# Altium PCB Sensor.PcbDoc
Units mm, origin at the board's own origin, x right, y up, seen from the top; angles counter-clockwise.
Board outline 47.6 x 56 mm, 2 copper layers (Top Layer, Bottom Layer), stack 1.591 mm thick; 35 components, 27 nets, 158 pads, 506 vias.
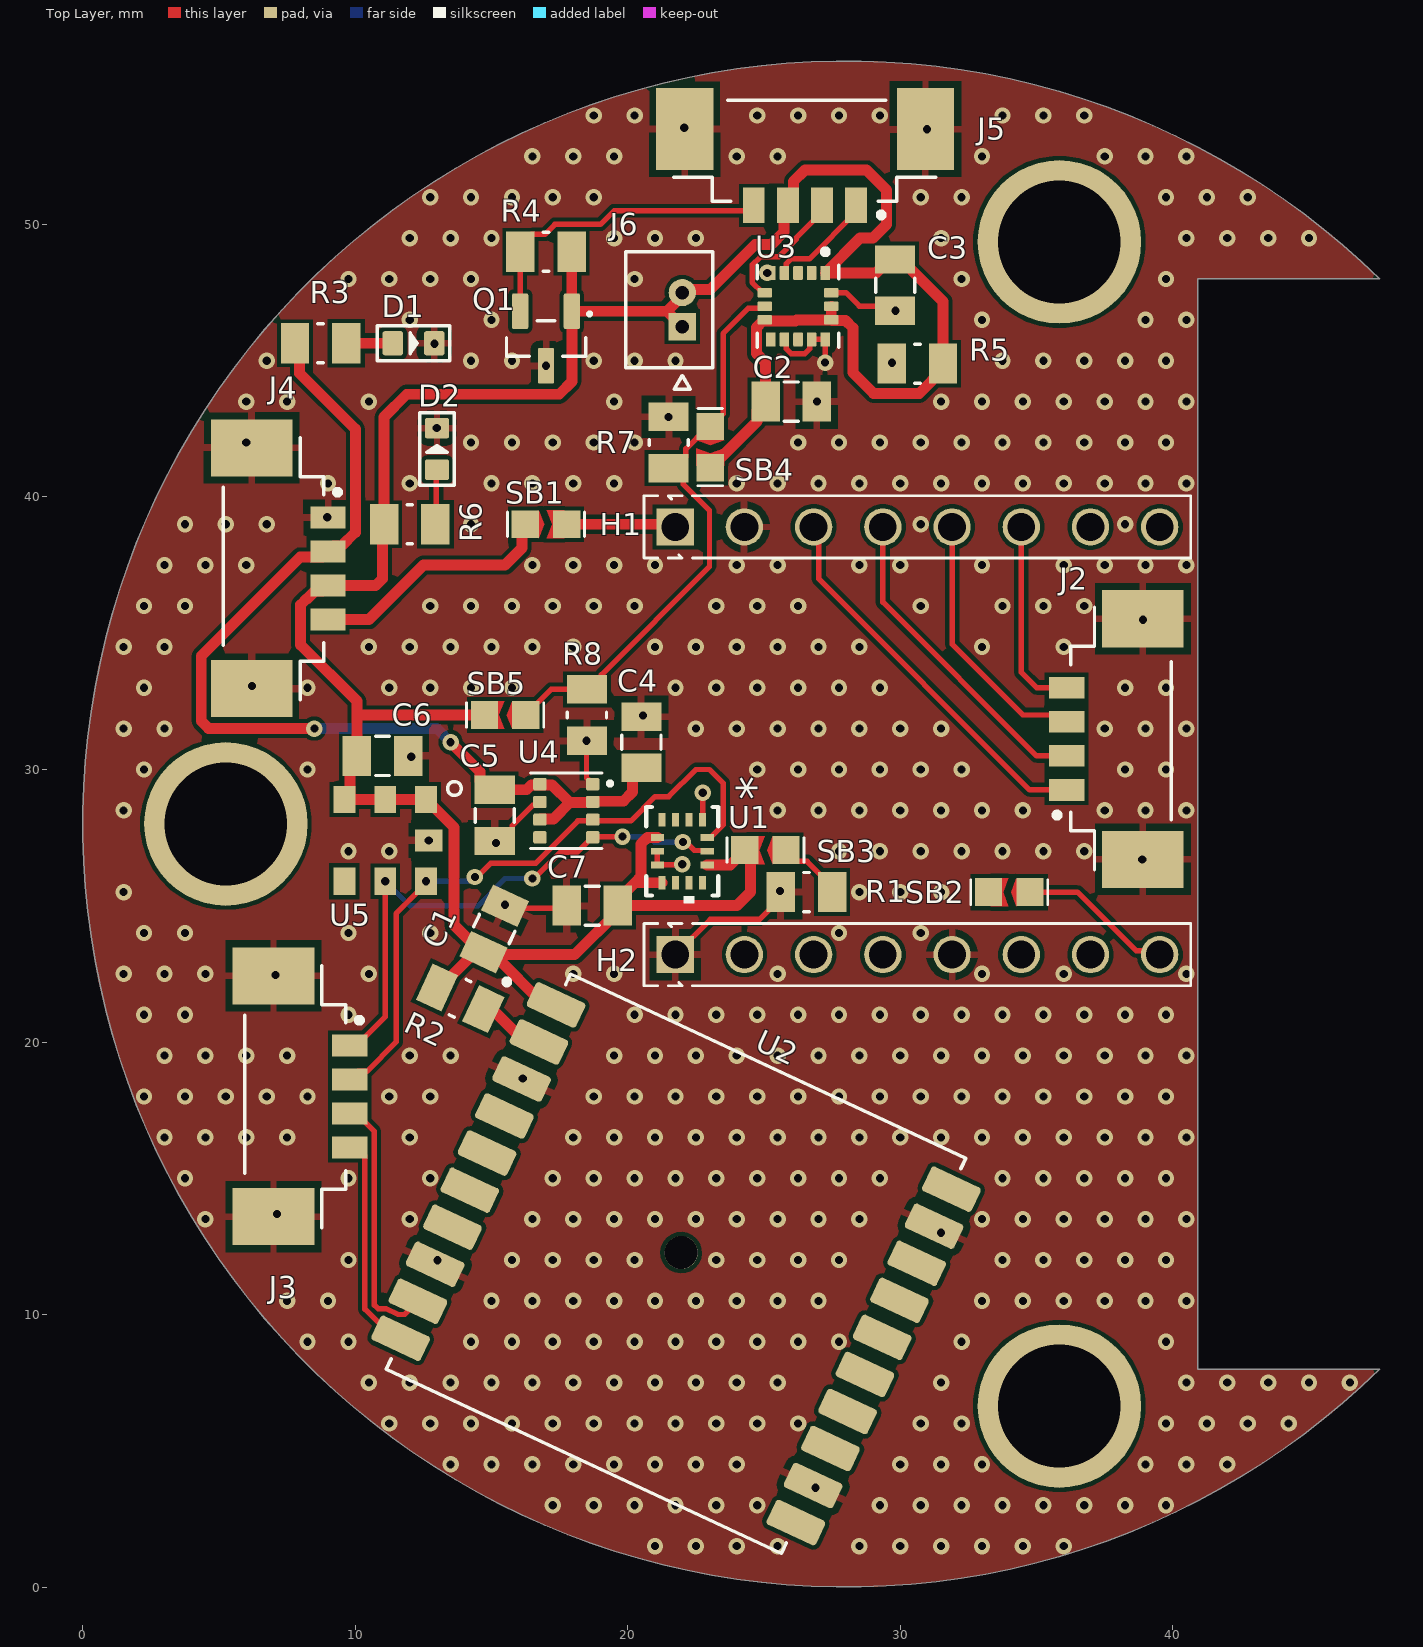
[diagram p0: Top Layer view]
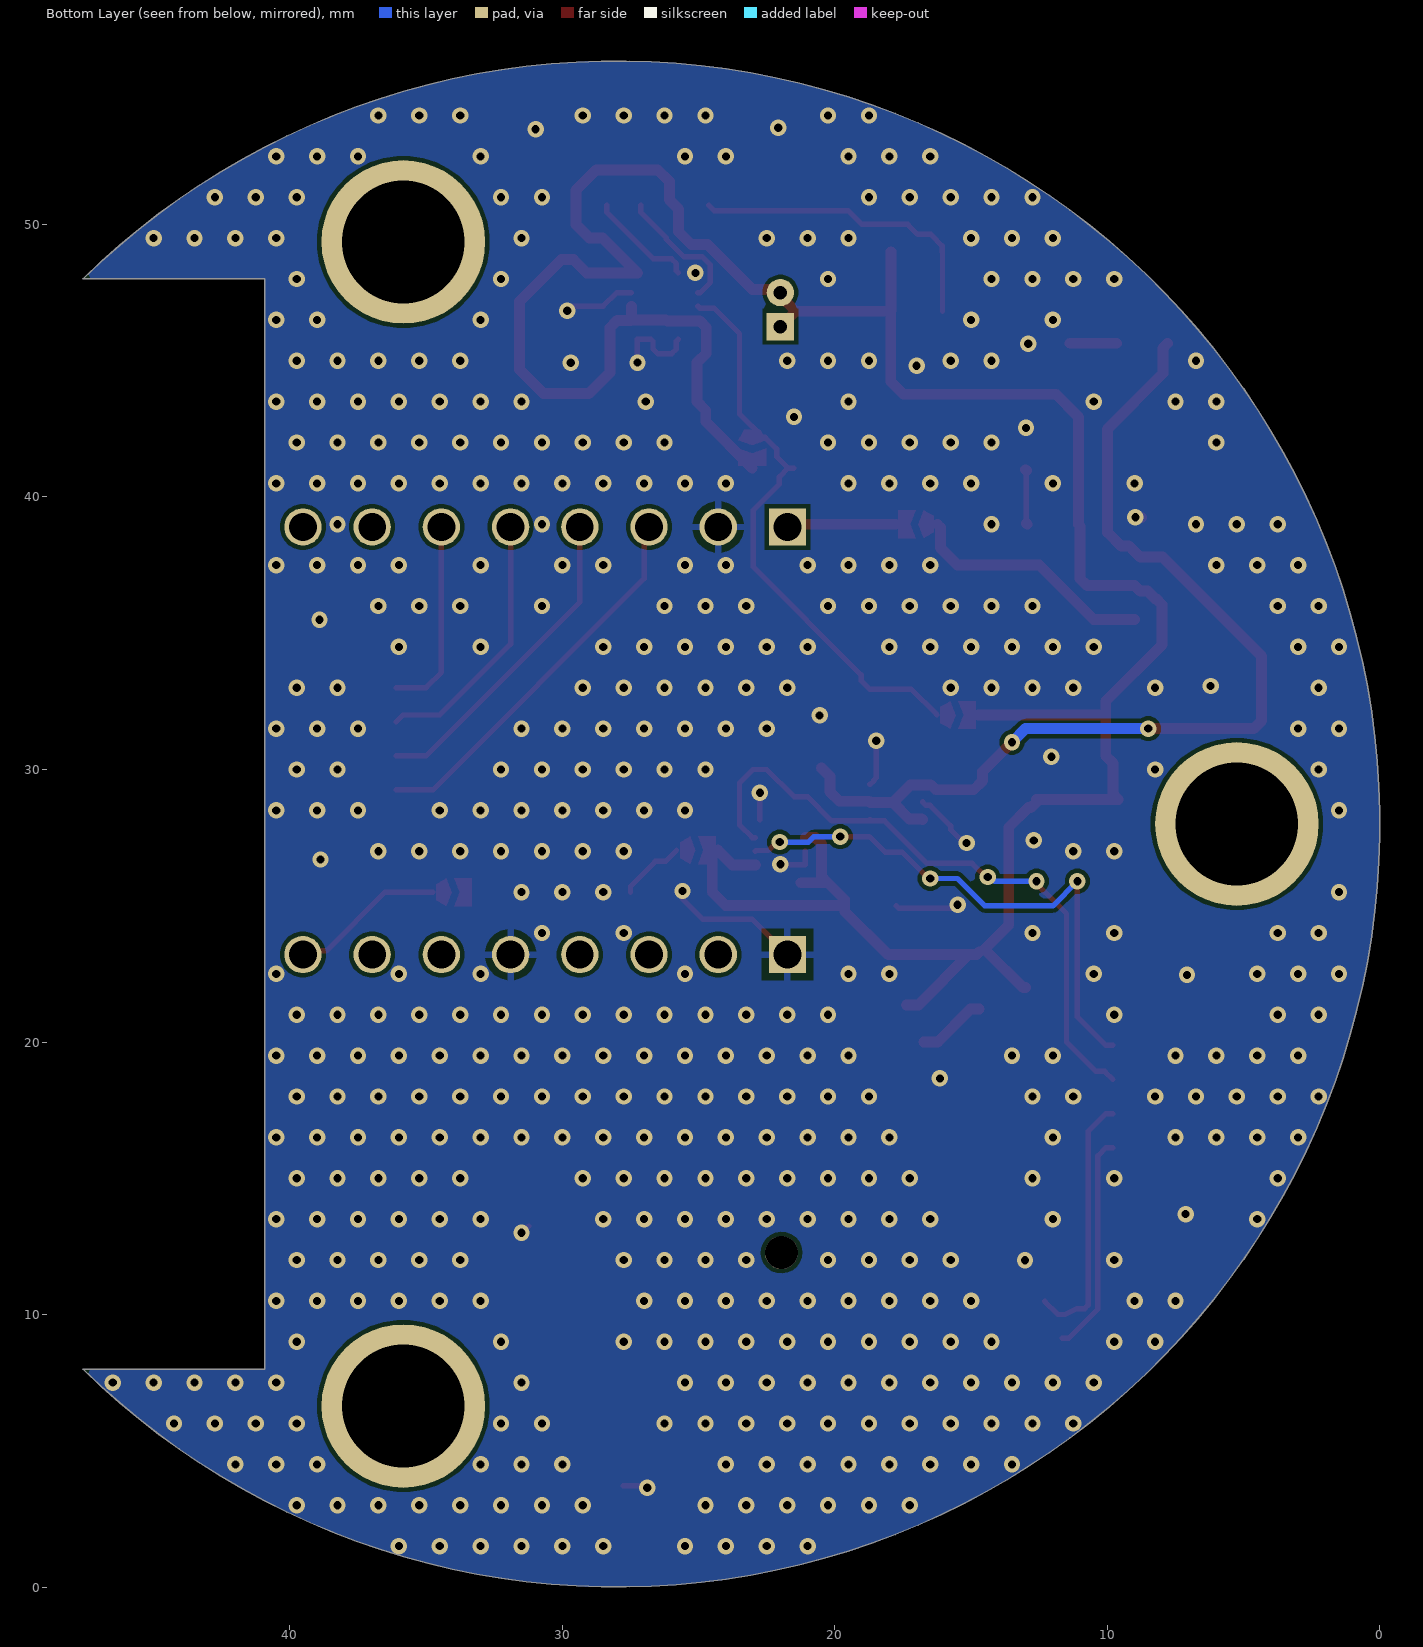
[diagram p1: Bottom Layer view, seen from below]
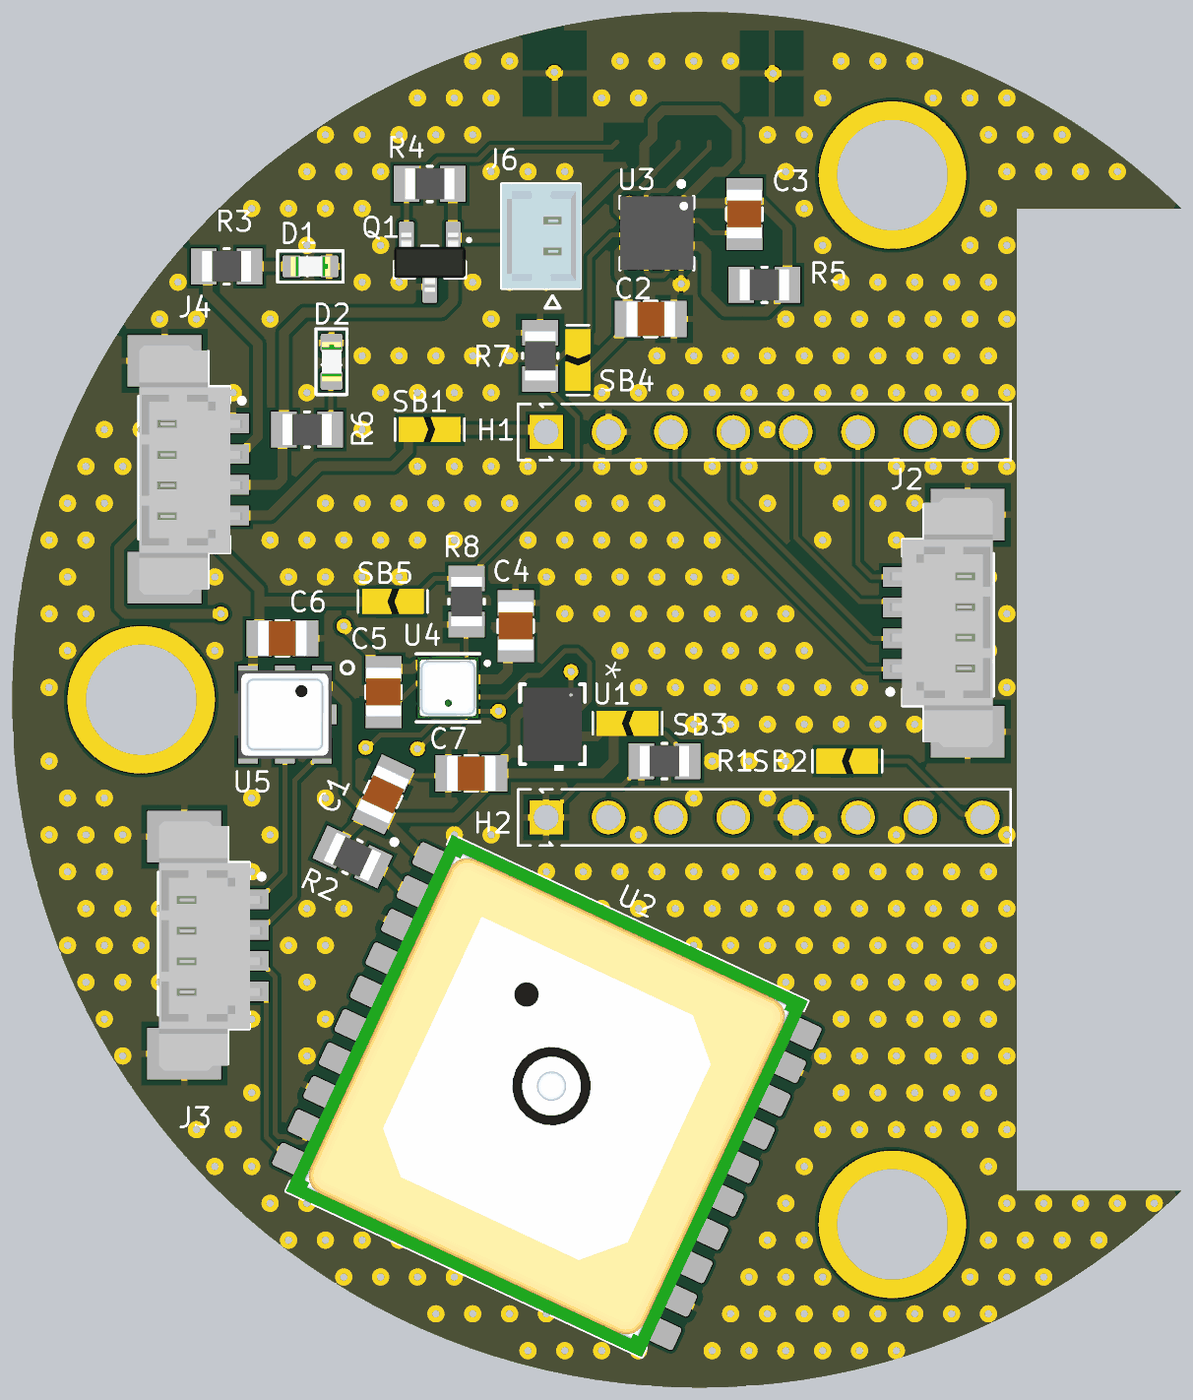
[diagram p2: 3D render of the assembled board from above, using the file's embedded part models]

## Layer stack, top to bottom
Top Solder: solder mask 0.0102, Solder Resist, Dk 3.5
Top Layer: signal copper 0.0356
Dielectric 1: dielectric 1.52, FR-4, Dk 4.8
Bottom Layer: signal copper 0.0356
Bottom Solder: solder mask 0.0102, Solder Resist, Dk 3.5

## Board outline
47.596,8 cw(c28,28) 47.596,48 47.6,48 40.913,48 40.913,8

## Design rules (kind name [scope] priority, off if disabled: settings)
Clearance [All] p1: gap=0.152 ignorepadtopadclearanceinfootprint=FALSE
HoleSize [All] p1: absolutevalues=TRUE maxlimit=6.2 minlimit=0.3 maxpercent=80.000 minpercent=20.000
MinimumAnnularRing [All] p1: minimumring=0.15
MinimumSolderMaskSliver [All] p1: minsoldermaskwidth=0.1
PolygonConnect ViaConnect [IsVia] p1: connectstyle=Direct reliefconductorwidth=0.254 reliefentries=4 polygonreliefangle="90 Angle" airgapwidth=0.254
PolygonConnect [All] p2: connectstyle=Relief reliefconductorwidth=0.254 reliefentries=4 polygonreliefangle="90 Angle" airgapwidth=0.254
RoutingVias [All] p1: holewidth=0.3 width=0.6 viastyle="Through Hole" minholewidth=0.3 minwidth=0.5 maxholewidth=1 maxwidth=5
SilkToSilkClearance [All] p1: silktosilkclearance=0.1
SilkToSolderMaskClearance [IsPad] p1: minsilkscreentomaskgap=0.1 clearancetoexposedcopper=TRUE
SolderMaskExpansion [All] p1: expansion=0.051 istentingtop=FALSE
SupplyNets "Schematic Supply Nets_3" [InNet('3V3_BUCK')] p1: voltage=0.000
SupplyNets "Schematic Supply Nets_2" [InNet('GND')] p2: voltage=0.000
SupplyNets "Schematic Supply Nets_1" [InNet('LIGHT2')] p3: voltage=0.000
SupplyNets "Schematic Supply Nets" [InNet('5V')] p4: voltage=0.000
Width Width_Power [All] p1: maxlimit=0.4 minlimit=0.2 preferedwidth=0.254 minimp=50.000000 maximp=50.000000 favimp=50.000000
Width [All] p2: maxlimit=25.4 minlimit=0.15 preferedwidth=0.3
26 further rules are at their usual default settings.

## Components (designator, comment, footprint, x,y, rotation, side; value= is the part's Value field where it differs from the comment)
C1 "*" CAPACITOR_0805_2012M-70N 15.103,24.148 r245 top
C2 "*" CAPACITOR_0805_2012M-70N 26,43.5 r0 top
C3 "*" CAPACITOR_0805_2012M-70N 29.814,47.773 r270 top
C4 "*" CAPACITOR_0805_2012M-70N 20.5,31 r90 top
C5 "*" CAPACITOR_0805_2012M-70N 15.118,28.315 r270 top
C6 "*" CAPACITOR_0805_2012M-70N 11,30.5 r0 top
C7 "*" CAPACITOR_0805_2012M-70N 18.696,25.004 r180 top
D1 "LED-SMD-RED-DIFFUSED(0603)" LED-0603 12.14,45.641 r0 top
D2 "LED-SMD-RED-DIFFUSED(0603)" LED-0603 13,41.762 r90 top
H1 "HDR,2.54mm,1x8" HEADER_2.54MM_1x8PIN 30.63,38.9 r0 top
H2 "HDR,2.54mm,1x8" HEADER_2.54MM_1x8PIN 30.63,23.209 r0 top
J2 "0533980471" MOLEX_0533980471 38.901,31.126 r90 top
J3 "0533980471" MOLEX_0533980471 7,18 r270 top
J4 "0533980471" MOLEX_0533980471 6.2,37.375 r270 top
J5 "0533980471" MOLEX_0533980471 26.5,53.5 r180 top
J6 "0530470210" MOLEX_0530470210 22,46.875 r270 top
Q1 "DSS5320T-7" SOT23-3N-1.15mm 17,45.816 r270 top
R1 "*" RESISTOR_0805_2012M-50N 26.56,25.5 r0 top
R2 "5=Value" RESISTOR_0805_2012M-50N 13.852,21.603 r335 top
R3 "*" RESISTOR_0805_2012M-50N 8.73,45.641 r180 top
R4 "*" RESISTOR_0805_2012M-50N 17,49 r0 top
R5 "*" RESISTOR_0805_2012M-50N 30.63,44.891 r0 top
R6 "*" RESISTOR_0805_2012M-50N 12,39 r180 top
R7 "*" RESISTOR_0805_2012M-50N 21.5,42 r270 top
R8 "*" RESISTOR_0805_2012M-50N 18.5,32 r90 top
SB1 "Solder Jumper Normally Open" "Solder bridge Chevron 0603 Open"#1 17,39 r0 top
SB2 "Solder Jumper Normally Open" "Solder bridge Chevron 0603 Open"#2 34,25.5 r180 top
SB3 "Solder Jumper Normally Open" "Solder bridge Chevron 0603 Open"#1 25.052,27.041 r180 top
SB4 "Solder Jumper Normally Open" "Solder bridge Chevron 0603 Open"#1 23.03,41.829 r270 top
SB5 "Solder Jumper Normally Open" "Solder bridge Chevron 0603 Open"#1 15.5,32 r180 top
U1 "BMI323" BMI323_BOS 22,27 r270 top
U2 "CD-PA1616D" XCVR_CD-PA1616D 21.769,11.863 r335 top
U3 "H3LIS100DLTR" PQFN50P300X300X100-16N 26.247,47 r270 top
U4 "BME280" PSON65P250X250X100-8N 17.746,28.486 r0 top
U5 "PRESSURE-BMP180(LGA7)" LGA7-1.5-3.8X3.6MM 11.1,27.4 r0 top

## Footprints (in the part's own frame and the unit in brackets; to place one, negate y for a bottom-side part, rotate by r counter-clockwise, add the part's x,y. Pads: shape width x height; smd on the part's side, far side on the other; paste and mask are expansions set on the pad)
BMI323_BOS [mil]
  rect 19x10 smd paste+0 mask+0: 1(-45.5,29.53) 2(-45.5,9.84) 3(-45.5,-9.84) 4(-45.5,-29.53) 8(45.5,-29.53) 9(45.5,-9.84) 10(45.5,9.84) 11(45.5,29.53)
  rect 10x19 smd paste+0 mask+0: 5(-19.69,-36) 6(0,-36) 7(19.68,-36) 12(19.68,36) 13(0,36) 14(-19.69,36)
  silkscreen extent -64,-52 75,52, body extent -59,-47 59,47, height 34
CAPACITOR_0805_2012M-70N [mm] "Capacitor, 0805 (2012 metric), 0.7mm high, nominal pads,"
  rect 1.04x1.47 smd mask+0.051: 1(-0.94,0) 2(0.94,0)
  silkscreen extent -0.25,-0.72 0.25,0.72, body extent -1,-0.73 1,0.73, height 1.23
HEADER_2.54MM_1x8PIN [mm]
  rect 1.37x1.37 hole 1.02: 1(-8.89,0)
  round 1.37 hole 1.02: 2(-6.35,0) 3(-3.81,0) 4(-1.27,0) 5(1.27,0) 6(3.81,0) 7(6.35,0) 8(8.89,0)
  silkscreen extent -10.03,-1.14 10.03,1.14, body extent -10.03,-1.14 10.03,1.14, height 8.2
LED-0603 [mil]
  rrect25% 30x35 smd: NEG(30,0) POS(-30,0)
  silkscreen extent -52,-25 52,25, body extent -31,-16 31,16, height 20
LGA7-1.5-3.8X3.6MM [mm]
  rect 0.8x1 smd: 1(1.5,1.5) 2(0,1.5) 3(-1.5,1.5) 4(-1.5,-1.5) 5(0,-1.5) 6(1.5,-1.5)
  rect 1x0.8 smd: 7(1.6,0)
  silkscreen extent 2.29,1.65 2.79,2.16, body extent -1.9,-1.8 1.9,1.8, height 1
MOLEX_0530470210 [mm]
  rect 1x1 hole 0.5 mask+0.051: 1(0.625,0)
  round 1 hole 0.5 mask+0.051: 2(-0.625,0)
  silkscreen extent -2.12,-2.07 2.93,1.12, body extent -2.12,-2.06 2.13,1.14, height 4.21
MOLEX_0533980471 [mm] "Header - Picoblade 04-pin, SMT, STR, 4.7mm height"
  rect 0.8x1.3 smd mask+0.051: 1(-1.875,2.8) 2(-0.625,2.8) 3(0.625,2.8) 4(1.875,2.8)
  rect 2.1x3 smd mask+0.051: MP1(-4.425,0) MP2(4.405,0)
  silkscreen extent -4.8,-1.05 4.82,3.25, body extent -5.05,-1.02 5.1,3.18, height 4.72
PQFN50P300X300X100-16N [mm]
  rrect25% 0.53x0.35 smd: 1(-1.22,1) 2(-1.22,0.5) 3(-1.22,0) 4(-1.22,-0.5) 5(-1.22,-1) 9(1.22,-1) 10(1.22,-0.5) 11(1.22,0) 12(1.22,0.5) 13(1.22,1)
  rrect25% 0.35x0.53 smd: 6(-0.5,-1.22) 7(0,-1.22) 8(0.5,-1.22) 14(0.5,1.22) 15(0,1.22) 16(-0.5,1.22)
  silkscreen extent -2.1,-1.5 1.5,1.5, body extent -1.5,-1.5 1.5,1.5, height 1
PSON65P250X250X100-8N [mm]
  rrect25% 0.49x0.45 smd paste+0 mask+0.102: 1(0.97,0.975) 2(0.97,0.325) 3(0.97,-0.325) 4(0.97,-0.975) 5(-0.97,-0.975) 6(-0.97,-0.325) 7(-0.97,0.325) 8(-0.97,0.975)
  silkscreen extent -1.3,-1.39 1.65,1.39, body extent -1.25,-1.25 1.25,1.25, height 1
RESISTOR_0805_2012M-50N [mm] "Resistor, 0805 (2012 metric), nominal pads"
  rect 1.04x1.47 smd mask+0.051: 1(-0.94,0) 2(0.94,0)
  silkscreen extent -0.1,-0.72 0.1,0.72, body extent -1,-0.63 1,0.62, height 0.5
"Solder bridge Chevron 0603 Open"#1 [mm] "Solder bridge for robust, easy to access bridges that are likely to be soldered and unsoldered often. Open."
  rect 1x1.02 smd paste-2539.97 mask+0: 1(-0.759,0) 2(0.759,0)
  Top Layer region: 0.677,0.51 0.677,0 0.227,0 0.033,0.51
  Top Layer region: 0.677,-0.51 0.677,0 0.227,0 0.033,-0.51
  Top Layer region: -0.631,-0.296 -0.631,0.304 -0.26,0.51 -0.065,0.003 -0.26,-0.506
  silkscreen extent -1.41,-0.45 1.41,0.45
"Solder bridge Chevron 0603 Open"#2 [mm] "Solder bridge for robust, easy to access bridges that are likely to be soldered and unsoldered often. Open."
  rect 1x1.02 smd paste-2539.97 mask+0: 1(-0.759,0) " "(0.759,0)
  Top Layer region: -0.631,-0.296 -0.631,0.304 -0.26,0.51 -0.065,0.003 -0.26,-0.506
  Top Layer region: 0.677,-0.51 0.677,0 0.227,0 0.033,-0.51
  Top Layer region: 0.677,0.51 0.677,0 0.227,0 0.033,0.51
  silkscreen extent -1.41,-0.45 1.41,0.45
SOT23-3N-1.15mm [mm] "SOT23, 3-pin, 1.15mm high, nominal pads"
  rrect25% 1.32x0.6 smd mask+0.051: 1(-1,0.95) 2(-1,-0.95) 3(1,0)
  silkscreen extent -0.93,-1.45 0.65,1.63, body extent -1.19,-1.45 1.21,1.45, height 0.91
XCVR_CD-PA1616D [mm]
  rrect25% 2x1 smd: 1(-8,6.75) 2(-8,5.25) 3(-8,3.75) 4(-8,2.25) 5(-8,0.75) 6(-8,-0.75) 7(-8,-2.25) 8(-8,-3.75) 9(-8,-5.25) 10(-8,-6.75) 11(8,-6.75) 12(8,-5.25) 13(8,-3.75) 14(8,-2.25) 15(8,-0.75) 16(8,0.75) 17(8,2.25) 18(8,3.75) 19(8,5.25) 20(8,6.75)
  round 1.21 hole 1.21 unplated: ""(0,0.45)
  silkscreen extent -10.1,-8 8,8, body extent -8,-8 8,8, height 6.7

## Part data
C1: library part "Generic Capacitor", "Passive - Capacitor, Generic", Tolerance=1%
C2 C3 C4 C5 C6 C7: library part "Generic Capacitor", "Passive - Capacitor, Generic", Tolerance=?%
D1 D2: "Red - LED Indication - Discrete 1.95V 0603 (1608 Metric)", Package="0603 Everlight Electronics", Check_prices=https://www.snapeda.com/parts/19-217/R6C-AL1M2VY/3T/Everlight/view-part/?ref=eda, MF="Everlight Electronics", MP=19-217/R6C-AL1M2VY/3T, SnapEDA_Link=https://www.snapeda.com/parts/19-217/R6C-AL1M2VY/3T/Everlight/view-part/?ref=snap
H1 H2: "Connector - 2.54mm, 1x8-pin"
J2 J3 J4 J5: "Connector - Picoblade 04-pin, SMT, STR", Supplier 1 Part No.=WM7608CT-ND, APSS Standard Part="APSS Standard", MF Part No.=0533980471, Mounting Type="Surface Mount", Orientation=Straight, Pins=4, Pitch=1.25mm, Supplier 1=Digikey
J6: "Connector - Picoblade 02-pin, TH, STR", Supplier 1 Part No.=WM1731-ND, APSS Standard Part="APSS Standard", MF Part No.=0530470210, Mounting Type=Through-hole, Orientation=Straight, Pins=2, Pitch=1.25mm, Supplier 1=Digikey
Q1: "Transistor - BJT PNP DSS5320T-7", Package=SOT-23-3, Power=600mW, Rated Voltage="20 Vce", Supplier 1 Part No.=DSS5320T-7DICT-ND, Temp Range="-55°C ~ 150°C (TJ)", APSS Standard Part="APSS Standard", MF Part No.=DSS5320T-7, Supplier 1=Digikey
R1 R2 R3 R4 R5 R6 R7 R8: library part "Generic Resistor", "Passive - Resistor, Generic", Tolerance=?%
  R2: R1=10k
U1: "Description", Manufacturer_Name="Bosch Sensortec", Copyright="Copyright (C) 2026 Ultra Librarian. All rights reserved.", Manufacturer_Part_Number=BMI323, RefDes=RefDes, Type=Type
U2: "CD-PA1616DGNSS patch antenna module", Package=Package, Check_prices=https://www.snapeda.com/parts/CD-PA1616D/CD+technology/view-part/?ref=eda, MF="CD Top", MP=CD-PA1616D, SnapEDA_Link=https://www.snapeda.com/parts/CD-PA1616D/CD+technology/view-part/?ref=snap
U3: "Accelerometer X, Y, Z Axis Â±100g 25Hz ~ 200Hz 16-TFLGA (3x3)", Package="TFLGA-16 STMicroelectronics", Check_prices=https://www.snapeda.com/parts/H3LIS100DLTR/STMicroelectronics/view-part/?ref=eda, MF=STMicroelectronics, MP=H3LIS100DLTR, SnapEDA_Link=https://www.snapeda.com/parts/H3LIS100DLTR/STMicroelectronics/view-part/?ref=snap
U4: "Board Mount Humidity Sensors MEMS humidity, pressure and temperature sensor", Package="LGA-8 Bosch", Check_prices=https://www.snapeda.com/parts/BME280/Bosch/view-part/?ref=eda, MF=Bosch, MP=BME280, SnapEDA_Link=https://www.snapeda.com/parts/BME280/Bosch/view-part/?ref=snap
U5: "Pressure Sensor 4.35PSI ~ 15.95PSI (30kPa ~ 110kPa) Absolute - 16 ~ 19 b 7-VLGA", Package="LGA-7 Bosch", Check_prices=https://www.snapeda.com/parts/BMP180/Bosch/view-part/?ref=eda, MF=Bosch, MP=BMP180, SnapEDA_Link=https://www.snapeda.com/parts/BMP180/Bosch/view-part/?ref=snap
SB1 SB2 SB3 SB4 SB5: DEBUG=DEBUG

## Free pads (board coordinates)
  round 6 hole 4.5: 1(5.25,28) 1(35.837,6.643) 1(35.837,49.357)

## Via types
v1: diameter 0.6, hole 0.3, Top Layer to Bottom Layer, 506 vias

## Nets (pads, with @x,y where several pads share a name; then routed paths per layer and width w, separated by ;. In a path a pad name is that pad's centre, name@x,y a point inside that pad or via, vN(x,y) a via of type N, cw(c..) or ccw(c..) an arc to the next point about the centre after c; other vN are vias at no path point)
3V3_BUCK: C4.1 C5.1 J4.2 R3.2 U4.2 U4.6 U4.8 | length 37.7
  Top Layer w0.4: R3.2 7.96,45.471 7.96,44.54 10.002,42.498 10.002,38.704 9.498,38.2 9.2,38.2 J4.2 8.8,37.8 7.982,37.8 4.348,34.166 4.348,31.774 4.622,31.5 v1(8.5,31.5) ; v1(13.5,31) 14.583,29.917 14.583,29.575 14.903,29.255 C5.1 16.285,29.255 16.466,29.436 17.221,29.436 17.871,28.786 ; U4.6 16.801,28.186 17.271,28.186 17.871,28.786 ; C4.1 20.494,30.06 20.174,29.74 20.174,29.174 19.836,28.836 18.741,28.836 18.691,28.786 17.871,28.786
  Bottom Layer w0.4: v1(8.5,31.5) 13,31.5 v1(13.5,31)
5V: J4.4 SB1.1 | length 9.1
  Top Layer w0.4: J4.4 10.5,35.5 12.5,37.5 15.5,37.5 16.124,38.124 16.124,38.883 SB1.1
CAM_IO14: H1.6 J2.4 | length 7.2
  Top Layer w0.2: H1.6 34.44,33.562 35.001,33.001 J2.4
CAM_IO15: H1.5 J2.3 | length 9.7
  Top Layer w0.2: H1.5 31.9,34.6 34.5,32 35.852,32 J2.3
CAM_RX: H1.3 J2.1 | length 14.3
  Top Layer w0.2: H1.3 27,38.72 27,37 34.749,29.251 J2.1
CAM_TX: H1.4 J2.2 | length 11.8
  Top Layer w0.2: H1.4 29.36,36.14 34.999,30.501 J2.2
GND: C1.1 C2.2 C3.2 C4.2 C5.2 C6.2 C7.2 D1.NEG D2.NEG H1.2 H2.1 H2.5 J2.MP1 J2.MP2 J3.MP1 J3.MP2 J4.1 J4.MP1 J4.MP2 J5.MP1 J5.MP2 Q1.3 R1.1 R5.1 R7.1 R8.1 U1.1 U1.6 U1.7 U2.3 U2.8 U2.12 U2.19 U3.5 U3.10 U3.12 U3.13 U3.16 U4.1 U4.7 U5.7 | length 21.2
  Top Layer w0.2: C5.2 15.333,27.375 15.753,27.795 15.753,27.932 16.507,28.686 16.651,28.686 U4.7 ; v1(15.495,25.038) 15.624,24.909 17.661,24.909 C7.2 ; v1(18.485,31.052) 18.485,29.693 18.571,29.606 18.571,29.586 18.696,29.461 U4.1 ; U1.6 U1.7 21.096,26.51 21.99,26.51 v1(22,26.521) ; H2.1 23.031,24.5 24.835,24.5 25.592,25.257 v1(25.592,25.539) ; U1.1 U1.1 22.751,29.145 v1(22.752,29.147) ; v1(25.12,48.222) 25.245,48.222 U3.5 ; U3.10 25.82,45.707 25.82,45.436 25.993,45.263 26.501,45.263 26.675,45.436 26.675,45.707 U3.12 U3.13 27.244,45.777 27.244,44.934 v1(27.241,44.931) ; U2.12 26.813,3.712 U2.12@27.767,3.712 ; U3.16 28,47.5 28.5,47 29.656,47 v1(29.821,46.835) ; U2.19 U2.19@31.478,13
  Top Layer w0.4: J4.1@8.75,39.25 J4.1
  other v1: 21,1.5 22.5,1.5 24,1.5 25.5,1.5 28.5,1.5 30,1.5 31.5,1.5 33,1.5 34.5,1.5 36,1.5 17.25,3 18.75,3 20.25,3 21.75,3 23.25,3 24.75,3 29.25,3 30.75,3 32.25,3 33.75,3 35.25,3 36.75,3 38.25,3 39.75,3 26.884,3.643 13.5,4.5 15,4.5 16.5,4.5 18,4.5 19.5,4.5 21,4.5 22.5,4.5 24,4.5 30,4.5 31.5,4.5 33,4.5 39,4.5 40.5,4.5 42,4.5 11.25,6 12.75,6 14.25,6 15.75,6 17.25,6 18.75,6 20.25,6 21.75,6 23.25,6 24.75,6 26.25,6 30.75,6 32.25,6 39.75,6 41.25,6 42.75,6 44.25,6 10.5,7.5 12,7.5 13.5,7.5 15,7.5 16.5,7.5 18,7.5 19.5,7.5 21,7.5 22.5,7.5 24,7.5 25.5,7.5 31.5,7.5 40.5,7.5 42,7.5 43.5,7.5 45,7.5 46.5,7.5 8.25,9 9.75,9 14.25,9 15.75,9 17.25,9 18.75,9 20.25,9 21.75,9 23.25,9 24.75,9 26.25,9 27.75,9 32.25,9 39.75,9 7.5,10.5 9,10.5 15,10.5 16.5,10.5 18,10.5 19.5,10.5 21,10.5 22.5,10.5 24,10.5 25.5,10.5 27,10.5 33,10.5 34.5,10.5 36,10.5 37.5,10.5 39,10.5 40.5,10.5 9.75,12 13.024,11.99 15.75,12 17.25,12 18.75,12 20.25,12 23.25,12 24.75,12 26.25,12 27.75,12 33.75,12 35.25,12 36.75,12 38.25,12 39.75,12 31.5,13 4.5,13.5 12,13.5 16.5,13.5 18,13.5 19.5,13.5 21,13.5 22.5,13.5 24,13.5 25.5,13.5 27,13.5 28.5,13.5 33,13.5 34.5,13.5 36,13.5 37.5,13.5 39,13.5 40.5,13.5 7.13,13.684 3.75,15 9.75,15 12.75,15 17.25,15 18.75,15 20.25,15 21.75,15 23.25,15 24.75,15 26.25,15 27.75,15 29.25,15 33.75,15 35.25,15 36.75,15 38.25,15 39.75,15 3,16.5 4.5,16.5 6,16.5 7.5,16.5 12,16.5 18,16.5 19.5,16.5 21,16.5 22.5,16.5 24,16.5 25.5,16.5 27,16.5 28.5,16.5 30,16.5 31.5,16.5 33,16.5 34.5,16.5 36,16.5 37.5,16.5 39,16.5 40.5,16.5 2.25,18 3.75,18 5.25,18 6.75,18 8.25,18 11.25,18 12.75,18 18.75,18 20.25,18 21.75,18 23.25,18 24.75,18 26.25,18 27.75,18 29.25,18 30.75,18 32.25,18 33.75,18 35.25,18 36.75,18 38.25,18 39.75,18 16.145,18.666 3,19.5 4.5,19.5 6,19.5 7.5,19.5 12,19.5 13.5,19.5 19.5,19.5 21,19.5 22.5,19.5 24,19.5 25.5,19.5 27,19.5 28.5,19.5 30,19.5 31.5,19.5 33,19.5 34.5,19.5 36,19.5 37.5,19.5 39,19.5 40.5,19.5 2.25,21 3.75,21 9.75,21 20.25,21 21.75,21 23.25,21 24.75,21 26.25,21 27.75,21 29.25,21 30.75,21 32.25,21 33.75,21 35.25,21 36.75,21 38.25,21 39.75,21 7.079,22.463 1.5,22.5 3,22.5 4.5,22.5 10.5,22.5 18,22.5 19.5,22.5 25.5,22.5 33,22.5 36,22.5 40.5,22.5 2.25,24 3.75,24 9.75,24 12.75,24 27.75,24 30.75,24 1.5,25.5 28.5,25.5 30,25.5 31.5,25.5 38.878,26.697 9.75,27 11.25,27 27.75,27 29.25,27 30.75,27 32.25,27 33.75,27 35.25,27 36.75,27 15.167,27.302 12.7,27.4 1.5,28.5 25.5,28.5 27,28.5 28.5,28.5 30,28.5 31.5,28.5 33,28.5 34.5,28.5 37.5,28.5 39,28.5 40.5,28.5 2.25,30 8.25,30 24.75,30 26.25,30 27.75,30 29.25,30 30.75,30 32.25,30 38.25,30 39.75,30 12.056,30.465 1.5,31.5 3,31.5 22.5,31.5 24,31.5 25.5,31.5 27,31.5 28.5,31.5 30,31.5 31.5,31.5 37.5,31.5 39,31.5 40.5,31.5 20.559,31.986 2.25,33 8.25,33 11.25,33 12.75,33 14.25,33 15.75,33 21.75,33 23.25,33 24.75,33 26.25,33 27.75,33 29.25,33 38.25,33 39.75,33 6.212,33.065 1.5,34.5 3,34.5 10.5,34.5 12,34.5 13.5,34.5 15,34.5 16.5,34.5 18,34.5 21,34.5 22.5,34.5 24,34.5 25.5,34.5 27,34.5 28.5,34.5 33,34.5 36,34.5 38.912,35.494 2.25,36 3.75,36 12.75,36 14.25,36 15.75,36 17.25,36 18.75,36 20.25,36 23.25,36 24.75,36 26.25,36 30.75,36 33.75,36 35.25,36 36.75,36 3,37.5 4.5,37.5 6,37.5 16.5,37.5 18,37.5 19.5,37.5 21,37.5 24,37.5 25.5,37.5 28.5,37.5 30,37.5 33,37.5 36,37.5 37.5,37.5 39,37.5 40.5,37.5 3.75,39 5.25,39 6.75,39 14.25,39 30.75,39 38.25,39 8.974,39.259 9,40.5 12,40.5 15,40.5 16.5,40.5 18,40.5 19.5,40.5 24,40.5 25.5,40.5 27,40.5 28.5,40.5 30,40.5 31.5,40.5 33,40.5 34.5,40.5 36,40.5 37.5,40.5 39,40.5 40.5,40.5 6,42 14.25,42 15.75,42 17.25,42 18.75,42 20.25,42 26.25,42 27.75,42 29.25,42 30.75,42 32.25,42 33.75,42 35.25,42 36.75,42 38.25,42 39.75,42 12.988,42.536 21.5,42.94 6,43.5 7.5,43.5 10.5,43.5 19.5,43.5 26.94,43.5 31.5,43.5 33,43.5 34.5,43.5 36,43.5 37.5,43.5 39,43.5 40.5,43.5 17,44.816 29.695,44.926 6.75,45 14.25,45 15.75,45 18.75,45 20.25,45 21.75,45 33.75,45 35.25,45 36.75,45 38.25,45 39.75,45 12.905,45.623 12,46.5 15,46.5 33,46.5 39,46.5 40.5,46.5 9.75,48 11.25,48 12.75,48 14.25,48 20.25,48 32.25,48 39.75,48 12,49.5 13.5,49.5 15,49.5 19.5,49.5 21,49.5 22.5,49.5 31.5,49.5 40.5,49.5 42,49.5 43.5,49.5 45,49.5 12.75,51 14.25,51 15.75,51 17.25,51 18.75,51 30.75,51 32.25,51 39.75,51 41.25,51 42.75,51 16.5,52.5 18,52.5 19.5,52.5 24,52.5 25.5,52.5 33,52.5 37.5,52.5 39,52.5 40.5,52.5 30.982,53.494 22.076,53.549 18.75,54 20.25,54 24.75,54 26.25,54 27.75,54 29.25,54 33.75,54 35.25,54 36.75,54
GPS_UART_RX: J3.4 U2.10 | length 8.1
  Top Layer w0.2: J3.4 10.05,16.125 10.35,15.825 10.35,10.2 11.424,9.126 U2.10
GPS_UART_TX: J3.3 U2.9 | length 9.5
  Top Layer w0.2: J3.3 10.05,17.375 10.702,16.723 10.702,10.346 10.835,10.213 11.115,10.213 11.572,10 11.814,10 U2.9
INT1_100: U3.11
INT1_323: U1.4
INT2_100: U3.9
INT2_323: U1.9
LIGHT1: J5.4 Q1.2 R4.1 | length 11.6
  Top Layer w0.2: Q1.2 16.05,48.99 R4.1 16.06,49.215 16.48,49.635 16.963,49.635 17.328,50 19,50 19.5,50.5 24.425,50.5 J5.4
LIGHT2: C1.2 C2.1 C3.1 C6.1 C7.1 J4.3 J5.3 J6.1 J6.2 Q1.1 R2.1 R4.2 R5.2 R6.2 SB3.2 SB4.2 SB5.2 U1.5 U1.8 U1.12 U2.1 U3.1 U3.8 U3.14 U3.15 U5.1 U5.2 U5.3 | length 110.8
  Top Layer w0.4: U5.1@12.6,28.8 12.8,28.6 12.898,28.6 13.62,27.878 13.62,24.288 C1.2@14.504,23.404 ; U5.1 U5.2 U5.3 9.8,29.1 9.8,30.24 C6.1 10.06,32 ; R2.1 13.101,22 C1.2@14.397,23.296 ; C1.2 14.796,23.205 C1.2@15.093,23.205 ; SB5.2 10.06,32 ; U2.1 16.937,21.361 C1.2@15.093,23.205 ; R4.2 17.945,48.995 17.945,46.821 Q1.1 ; U1.5 20.719,27.5 20.492,27.273 20.492,26.075 20.262,25.844 ; U1.8 20.262,25.844 ; J6.1 21.434,46.816 ; U1.12 23.762,26.5 24.293,27.031 SB3.2 24.5,26.834 24.5,25.5 24.004,25.004 C7.1 ; SB4.2 23.04,41.07 24.74,42.77 24.74,43.18 C2.1 25.06,44.93 24.72,45.27 24.72,46.223 24.952,46.456 26.155,46.456 26.199,46.5 U3.14 ; U3.15 U3.14 ; 10.06,32 10.06,32.509 7.998,34.572 7.998,36.046 8.204,36.252 8.228,36.252 8.526,36.55 8.8,36.55 J4.3 10.75,36.75 11,37 11,38.94 R6.2 11.06,42.94 11.889,43.769 17.484,43.769 17.95,44.234 Q1.1 ; C1.2@15.093,23.205 18.053,23.205 19.636,24.789 C7.1 ; Q1.1 21.434,46.816 ; C7.1 19.636,25.219 20.262,25.844 ; 21.434,46.816 22,47.381 J6.2 22.115,47.615 23.027,47.615 24.677,49.265 25.268,49.265 25.738,49.734 25.738,50.563 26.075,50.9 26.075,51.575 26.5,52 28.766,52 29.5,51.266 29.5,50 29,49.5 28.527,49.5 U3.1 29.105,48.22 29.599,48.713 C3.1 30.029,48.713 31.57,47.172 R5.2 31.57,44.676 30.698,43.803 29.024,43.803 28.258,44.569 28.258,46.209 27.992,46.475 27.492,46.475 U3.14
NetD1_POS: D1.POS R3.1 | length 1.7
  Top Layer w0.4: R3.1 D1.POS
NetD2_POS: D2.POS R6.1 | length 2
  Top Layer w0.2: R6.1@12.97,39.03 D2.POS@12.97,40.97
  Top Layer w0.4: R6.1 R6.1@12.97,39.03 ; D2.POS@12.97,40.97 D2.POS
NetH1_1: H1.1 SB1.2 | length 4
  Top Layer w0.4: SB1.2 21.64,39 H1.1
NetH2_8: H2.8 SB2.1 | length 5.7
  Top Layer w0.2: SB2.1 36.5,25.5 38.659,23.341 39.388,23.341 H2.8
NetR2_2: R2.2 U2.2 | length 2.5
  Top Layer w0.4: R2.2 15.019,21.205 16.222,20.002 U2.2
PRESSURE_ADDR: U4.5
SA0: R7.2 R8.2 SB4.1 SB5.1 U3.7 | length 21.2
  Top Layer w0.2: SB5.1 16.259,32.01 17.189,32.94 R8.2 18.715,32.94 19.035,33.26 19.035,33.475 23,37.44 23,39.508 22.035,40.473 22.035,40.74 R7.2@21.715,41.06 ; R7.2 R7.2@21.715,41.06 ; SB4.1 22.63,42.188 22.555,42.188 22.135,41.768 22.135,41.48 R7.2@21.715,41.06 ; SB4.1@23.04,42.588 23.5,43.048 23.5,46 24.427,46.927 24.955,46.927 U3.7
SCL1: J3.1 U1.13 U4.4 U5.5 | length 20.2
  Top Layer w0.2: J3.1 10.05,19.875 11.1,20.925 v1(11.1,25.9) ; v1(16.5,26) 16.557,26 17.529,26.971 18.156,26.971 18.696,27.511 U4.4 18.73,27.525 19.791,27.525 v1(19.805,27.538) ; v1(22.022,27.337) 22.13,27.337 22.44,27.027 22.887,27.027 U1.13
  Bottom Layer w0.2: v1(11.1,25.9) 12,25 14.5,25 15.5,26 v1(16.5,26) ; v1(19.805,27.538) 20.774,27.538 20.975,27.337 v1(22.022,27.337)
SCL2: J5.1 U3.4 | length 4
  Top Layer w0.2: U3.4 25.82,48.293 25.82,48.564 25.993,48.737 26.662,48.737 28.375,50.45 J5.1
SDA1: J3.2 U1.14 U4.3 U5.6 | length 23.8
  Top Layer w0.2: J3.2 10.1,18.925 10.425,18.925 11.5,20 11.5,24.716 12.284,25.5 12.3,25.5 12.6,25.8 v1(12.6,25.9) ; v1(14.388,26.054) 14.463,26.054 14.967,26.558 16.617,26.558 18.171,28.112 18.667,28.112 U4.3 18.761,28.117 20.117,28.117 21,29 21.5,29 22.5,30 23,30 23.5,29.5 23.5,27.971 23.029,27.5 U1.14
  Bottom Layer w0.2: v1(12.6,25.9) 14.126,25.9 14.28,26.054 v1(14.388,26.054)
SDA2: J5.2 U3.6 | length 4.9
  Top Layer w0.2: U3.6 24.937,47.5 24.567,47.87 24.567,48.515 24.864,48.812 25.536,48.812 26.181,49.457 26.181,49.506 27.125,50.45 J5.2
SDO: R1.2 SB3.1 | length 2.5
  Top Layer w0.2: SB3.1 25.811,27.031 26.211,26.631 26.584,26.631 27.5,25.715 R1.2
pads on no net: "SB2. " H1.7 H1.8 H2.2 H2.3 H2.4 H2.6 H2.7 U1.2 U1.3 U1.10 U1.11 U2. U2.4 U2.5 U2.6 U2.7 U2.11 U2.13 U2.14 U2.15 U2.16 U2.17 U2.18 U2.20 U3.2 U3.3 U5.4

## Polygon pours and split planes (outlines as drawn)
GND on Bottom Layer "GND_L02_P000" (solid, pour order 0): 47.596,8 cw(c28,28) 47.596,48 47.6,48 40.913,48 40.913,8
GND on Top Layer "GND_L01_P001" (solid, pour order 1): 47.596,8 cw(c28,28) 47.596,48 47.6,48 40.913,48 40.913,8

## Text inside footprints (layer, text, board x,y; h text height)
U1: Top Overlay "*" at 23.469,29.749 h1.27 r270; Component Outlines "*" at 22.365,28.232 h1.27 r270